# EAGLE board ORing_block (EAGLE 8.1.0)
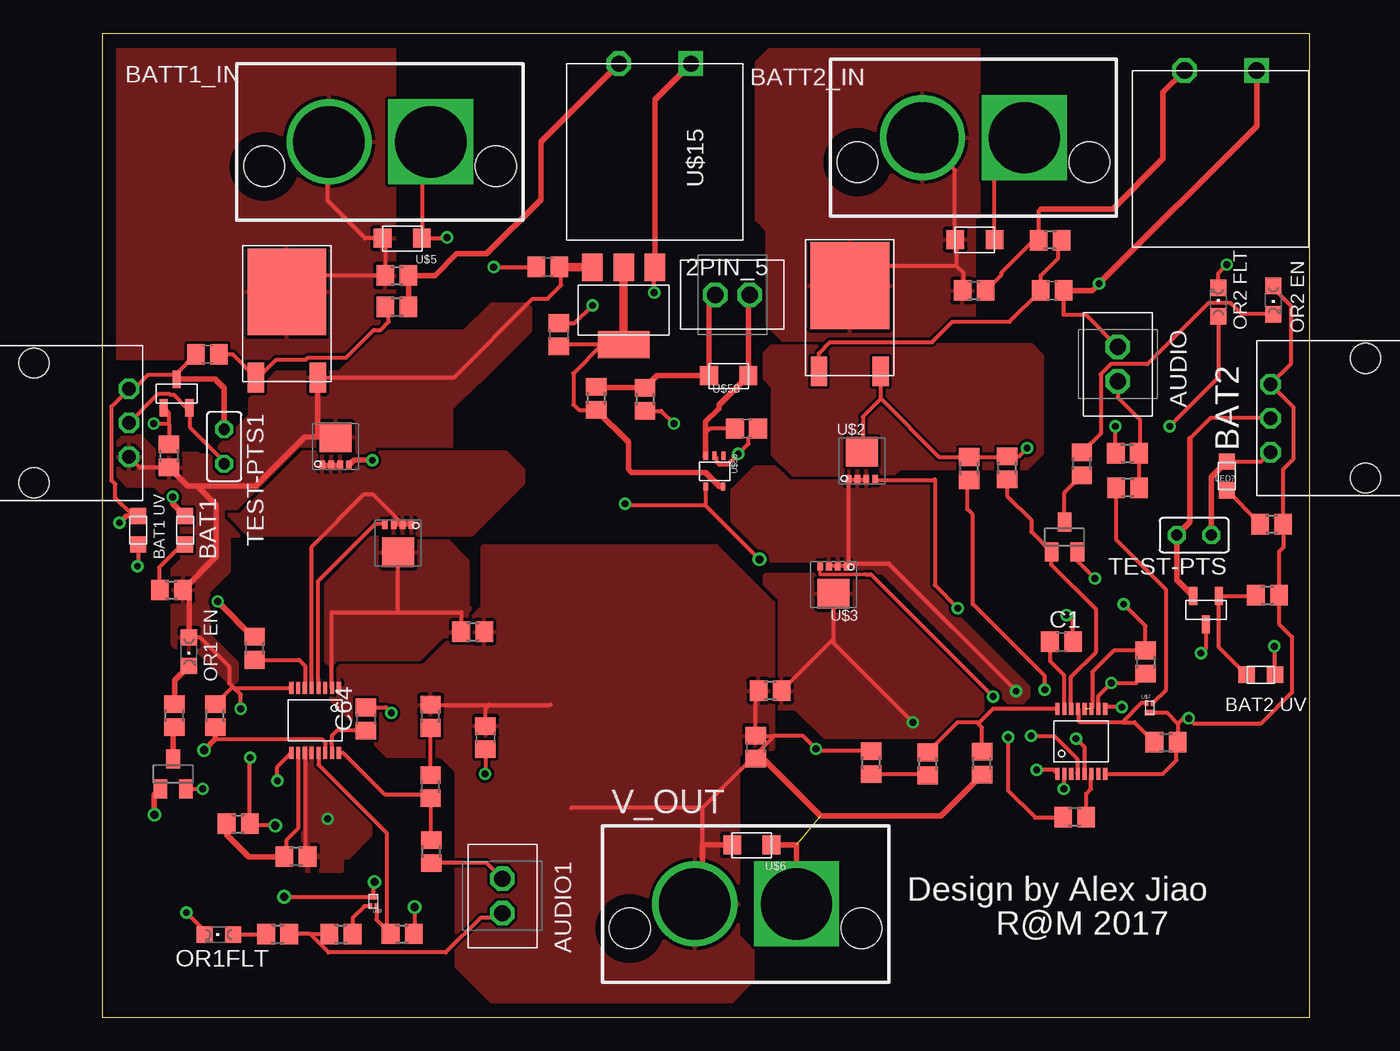
[diagram p0: board, top side]
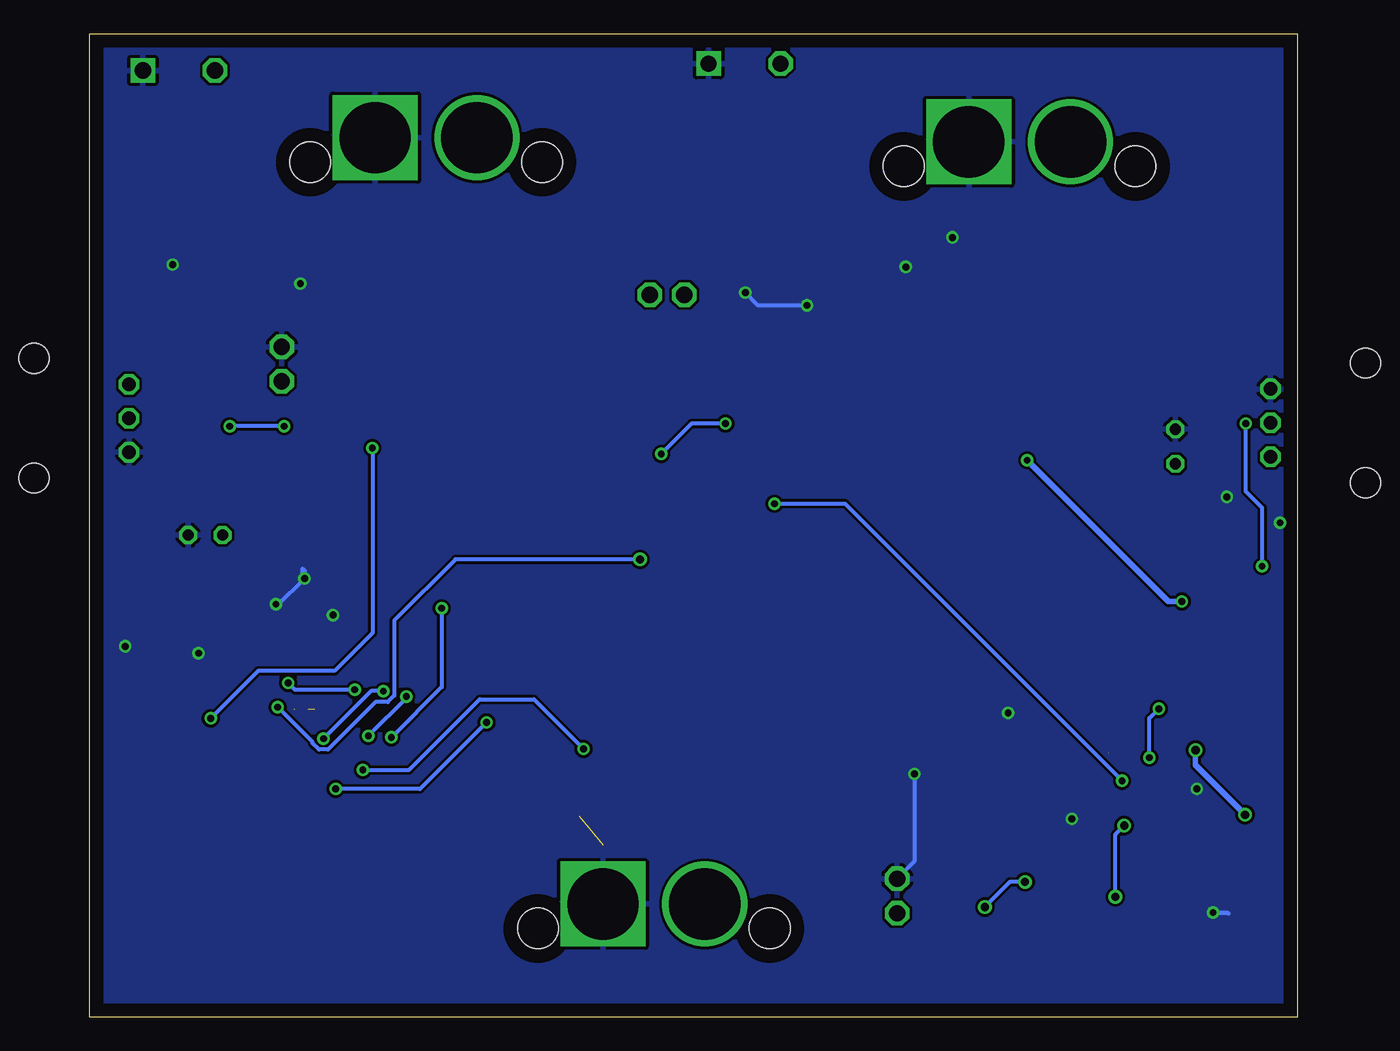
[diagram p1: board, bottom side, seen from below]

Size 88.9 x 72.39 mm. Coordinates in mm from the lower left corner, seen from the top.
Outline: 0,0 88.9,0 88.9,72.39 0,72.39 0,0
Copper layers (1*16): Top 0.035mm / dielectric 1.5mm / Bottom 0.035mm
Design rules "default": minimum track width 10mil, minimum drill 24mil, track to track 8mil, track to pad 8mil, pad to pad 8mil, via to via 8mil, smd to smd 8mil, copper to edge 40mil, drill to drill 8mil, minimum pad ring 10mil, minimum via ring 8mil, stop-mask expansion 4mil, vias tented up to drill 0mil, thermal gap 10mil

## Footprints (pad centres in the part's own frame; a part is rotated, then mirrored left to right if it is on the bottom)
KK254_VERT_2PIN = drill 1.2 octagon: P$1 1.27,0; P$2 -1.27,0
SUPERSABRE_2CIRCUIT = drill 5.25: P$1 -3.747,0 | drill 5.25 square: P$2 3.747,0 | hole 2.997: -8.534,-1.803; 8.534,-1.803
C0805 = smd 1.3 x 1.5: 1 -0.85,0; 2 0.85,0
CHIPLED_0805 = smd 1.2 x 1.2: A 0,-1.05; C 0,1.05
0805 = smd 1.2 x 1.2: P$1 -1.05,0; P$2 1.05,0
PTV09A-4 = drill 1 octagon: P$1 -2.5,0; P$2 0,0; P$3 2.5,0 | hole 2.2: -4.4,7; 4.4,7
R0805 = smd 1.3 x 1.5: 1 -0.85,0; 2 0.85,0
V526-0 = drill 0.813 octagon: 1 -1.27,0; 2 1.27,0
MSOP16 = smd 0.305 x 0.889: DGATE -0.25,-2.39; ENOUT -0.75,2.39; FB -1.75,2.39; FLT -0.25,2.39; GND 0.25,2.39; HGATE 0.75,-2.39; NC -0.75,-2.39; NC1 1.25,-2.39; OUT -1.75,-2.39; OV 0.75,2.39; SENSE -1.25,-2.39; SHDN 1.75,2.39; SOURCE 0.25,-2.39; TMR -1.25,2.39; UV 1.25,2.39; VCC 1.75,-2.39
POWER33 = smd 2.37 x 2.15: DRAIN 0,0.675 | smd 0.42 x 0.7: GATE 0.975,-1.4; SOURCE1 -0.975,-1.4; SOURCE2 -0.325,-1.4; SOURCE3 0.325,-1.4
DO-219AB = smd 1.3 x 1.4: P$1 -1.45,0; P$2 1.45,0
AP02002 = smd 0.4 x 0.25: P$1 -0.35,0.225; P$2 -0.35,-0.225 | smd 0.4 x 0.7: P$3 0.35,0
SOT23 = smd 1 x 1.4: 1 -0.95,-1.1; 2 0.95,-1.1; 3 0,1.1
SOT-23-3 = smd 1.3 x 0.6: P$1 -1.05,0.95; P$2 -1.05,-0.95; P$3 1.05,0
TO252-3 = smd 1.2 x 2.2: 1 -2.28,-6.3; 3 2.28,-6.3 | smd 5.8 x 6.4: TAB 0,0
GPTS203211B = drill 1.2 square: P$1 0,-2.65 | drill 1.2 octagon: P$2 0,2.65
TSSOP5 = smd 0.3 x 0.6: P$1 -0.65,-1.125; P$2 0,-1.125; P$3 0.65,-1.125; P$4 0.65,1.125; P$5 -0.62,1.125
SOT-223 = smd 1.5 x 2: P$1 -2.3,-3.15; P$2 0,-3.15; P$3 2.3,-3.15 | smd 3.8 x 2: P$4 0,2.54

## Placement (x,y rotation side)
2PIN_5  [KK254_VERT_2PIN]  46.4,53.18 180 top
AUDIO  [KK254_VERT_2PIN]  74.78,48.08 270 top
AUDIO1  [KK254_VERT_2PIN]  29.47,8.91 270 top
BATT1_IN  2_SUPERSABRE  [SUPERSABRE_2CIRCUIT]  20.45,64.45 0 top
BATT2_IN  2_SUPERSABRE  [SUPERSABRE_2CIRCUIT]  64.15,64.75 0 top
C1  [C0805]  70.63,27.63 0 top
C2  22u  [C0805]  48.12,19.87 270 top
C3  2.2u  [C0805]  7.75,48.8 180 top
C20  2.2u  [C0805]  69.95,53.5 0 top
C60  1u  [C0805]  47.44,43.33 180 top
C61  10u  [C0805]  32.82,55.23 180 top
C62  10u  [C0805]  33.63,50.25 90 top
C64  [C0805]  19.42,21.95 90 top
C65  22u  [C0805]  28.22,20.58 270 top
JP6  2_SUPERSABRE  [SUPERSABRE_2CIRCUIT]  47.38,8.33 0 top
LED1  Red  [CHIPLED_0805]  82.18,52.65 0 top
LED2  Red  [CHIPLED_0805]  8.6,6.08 90 top
LED3  [CHIPLED_0805]  6.4,26.9 180 top
LED4  [CHIPLED_0805]  86.23,52.8 180 top
LED5  Blue  [0805]  85.3,25.2 0 top
LED6  Blue  [0805]  2.65,35.84 90 top
LED7  Green  [0805]  82.8,39.85 90 top
LED8  Green  [0805]  6.1,35.85 90 top
POT  10k  [PTV09A-4]  86.02,44.1 270 top
POT1  10k  [PTV09A-4]  1.98,43.75 90 top
R2  20.8k  [R0805]  76.82,26.14 270 top
R4  51k  [R0805]  60.77,18.64 270 top
R5  5m  [R0805]  49.18,24.03 180 top
R6  10\  [R0805]  71.6,14.73 180 top
R7  200k  [R0805]  63.83,40.39 90 top
R8  8.2k  [R0805]  56.63,18.74 90 top
R9  5.1k  [R0805]  64.78,18.69 90 top
R10  510  [R0805]  39.97,45.49 270 top
R11  6.8k  [R0805]  36.37,45.56 270 top
R12  20k+  [R0805]  78.32,20.23 0 top
R13  430  [R0805]  75.48,41.52 0 top
R14  330  [R0805]  75.5,38.98 180 top
R15  20k+  [R0805]  22.09,6.13 0 top
R16  430  [R0805]  12.92,6.12 0 top
R17  330  [R0805]  17.59,6.12 0 top
R18  1.2k  [R0805]  5.33,22.19 90 top
R19  20k+  [R0805]  8.33,22.19 90 top
R21  12k  [R0805]  14.28,11.82 180 top
R23  51k  [R0805]  24.18,16.96 90 top
R24  5.1k  [R0805]  24.23,12.19 90 top
R25  5m  [R0805]  27.28,28.37 0 top
R26  10\  [R0805]  11.23,27.15 90 top
R27  200k  [R0805]  10.02,14.23 0 top
R28  8.2k  [R0805]  24.18,22.14 90 top
R29  1.2k  [R0805]  72.13,40.74 90 top
R30  20k+  [R0805]  66.63,40.44 90 top
R31  330  [R0805]  4.92,41.33 270 top
R32  330  [R0805]  85.79,31.07 0 top
R33  1.5k  [R0805]  86.1,36.3 0 top
R34  1.5k  [R0805]  5.1,31.45 0 top
R35  43k  [R0805]  69.8,57.2 180 top
R36  4.3k  [R0805]  64.2,53.5 0 top
R37  43k  [R0805]  21.7,52.3 0 top
R38  4.3k  [R0805]  21.7,54.6 0 top
TEST-PTS  0  [V526-0]  80.4,35.48 180 top
TEST-PTS1  0  [V526-0]  8.98,42.01 270 top
U$1  LTC4364MSOP  [MSOP16]  72.09,20.3 0 top
U$2  [POWER33]  55.94,40.95 0 top
U$3  [POWER33]  53.84,31.85 180 top
U$5  VTVS  [DO-219AB]  22.1,57.35 180 top
U$6  VTVS  [DO-219AB]  47.83,12.68 180 top
U$7  DMP32D5SFB  [AP02002]  77.13,22.77 270 top
U$8  DMP32D5SFB  [AP02002]  19.97,8.52 90 top
U$9  BSS138CT-NDSOT23  [SOT23]  5.23,17.9 0 top
U$10  BSS138CT-NDSOT23  [SOT23]  70.85,35.35 0 top
U$11  TL431DBZ  [SOT-23-3]  81.27,29.96 270 top
U$12  TL431DBZ  [SOT-23-3]  5.48,45.91 90 top
U$13  VTVS  [DO-219AB]  64.25,57.25 180 top
U$14  IPD50P04P4-13  [TO252-3]  13.6,53.4 0 top
U$15  GPTS203212B  [GPTS203211B]  40.7,70.2 90 top
U$19  IPD50P04P4-13  [TO252-3]  55.05,53.85 0 top
U$20  GPTS203212B  [GPTS203211B]  82.35,69.7 90 top
U$27  LTC4364MSOP  [MSOP16]  15.68,21.85 180 top
U$28  [POWER33]  17.19,42.02 0 top
U$32  [POWER33]  21.8,34.9 180 top
U$56  74LVC1G14  [TSSOP5]  45.09,40.2 180 top
U$57  NCP1117  [SOT-223]  38.4,52.05 180 top
U$58  VTVS  [DO-219AB]  46.13,47.23 180 top

## Library data of the parts
2PIN_5 AUDIO AUDIO1 BATT1_IN BATT2_IN JP6 = molex
C1-C3 C20 C60-C62 C64 C65 POT POT1 R2 R4-R19 R21 R23-R38 TEST-PTS TEST-PTS1 = resistor
LED1-LED8 = led
U$1 U$27 = linear
U$2 U$3 U$28 U$32 = fairchild
U$5 U$6 U$13 U$58 = diode
U$7-U$10 = transistor-fet
U$11 U$12 = texas
U$14 U$19 = transistor-power
U$15 U$20 = switches
U$56 = NXP
U$57 = ONSemi

## Nets
GND: AUDIO1.P$2 AUDIO.P$2 BATT1_IN.P$2 BATT2_IN.P$2 C1.2 C2.2 C3.2 C20.2 C61.2 C62.2 C64.2 C65.2 JP6.P$2 LED1.C LED2.C LED5.P$2 LED6.P$2 LED7.P$2 LED8.P$2 POT1.P$3 POT.P$3 R2.1 R9.1 R21.1 R24.1 TEST-PTS1.1 TEST-PTS.1 U$1.GND U$1.OV U$5.P$1 U$6.P$1 U$9.2 U$10.2 U$11.P$3 U$12.P$3 U$13.P$1 U$15.P$1 U$20.P$1 U$27.GND U$27.OV U$57.P$1
N$1: R2.2 R7.1 U$1.UV
N$3: R4.1 R9.2 U$1.FB
N$4: R6.1 U$1.HGATE
N$6: C1.1 U$1.TMR
N$7: R4.2 R8.1
N$8: R6.2 U$2.GATE
N$9: U$1.SOURCE U$2.SOURCE1 U$2.SOURCE2 U$2.SOURCE3 U$3.SOURCE1 U$3.SOURCE2 U$3.SOURCE3
N$10: R5.1 U$1.SENSE U$3.DRAIN
N$11: U$1.DGATE U$3.GATE
N$12: 2PIN_5.P$1 R10.1 R11.1 U$58.P$2
N$13: C62.1 R11.2 U$56.P$5 U$57.P$2 U$57.P$4
N$14: U$1.SHDN U$27.SHDN U$56.P$4
N$15: R14.2 U$7.P$1
N$16: LED1.A R13.1
N$17: R12.1 U$1.FLT U$7.P$2
N$18: AUDIO.P$1 R13.2 R14.1
N$19: LED2.A R16.1
N$20: R15.1 U$8.P$2 U$27.FLT
N$21: R17.2 U$8.P$1
N$22: AUDIO1.P$1 R16.2 R17.1
N$23: POT.P$2 TEST-PTS.2 U$11.P$2
N$24: R18.1 U$9.3
N$25: LED3.C R18.2
N$26: R29.1 U$10.3
N$27: LED4.C R29.2
N$28: R30.1 U$1.ENOUT U$10.1
N$29: R19.1 U$9.1 U$27.ENOUT
N$30: LED5.P$1 R32.1 U$11.P$1
N$31: POT1.P$2 TEST-PTS1.2 U$12.P$2
N$32: LED6.P$1 R31.1 U$12.P$1
N$33: LED7.P$1 R33.1
N$34: LED8.P$1 R34.1
N$35: C20.1 R35.1 U$19.1
N$36: R35.2 R36.2 U$20.P$2
N$37: R26.1 U$27.HGATE
N$38: BATT1_IN.P$1 R38.1 U$5.P$2 U$14.TAB
N$39: R21.2 R27.1 U$27.UV
N$40: C3.1 R37.1 U$14.1
N$41: R37.2 R38.2 U$15.P$2
N$45: BATT2_IN.P$1 R36.1 U$13.P$2 U$19.TAB
N$48: 2PIN_5.P$2 C60.2 U$56.P$3 U$58.P$1
N$49: C60.1 R10.2 U$56.P$2
N$50: R23.1 R24.2 U$27.FB
N$53: C64.1 U$27.TMR
N$54: U$27.SOURCE U$28.SOURCE1 U$28.SOURCE2 U$28.SOURCE3 U$32.SOURCE1 U$32.SOURCE2 U$32.SOURCE3
N$57: R23.2 R28.1
N$59: R26.2 U$28.GATE
N$60: R25.1 U$27.SENSE U$32.DRAIN
N$61: U$27.DGATE U$32.GATE
V_BATT: C2.1 C65.1 JP6.P$1 R5.2 R8.2 R25.2 R28.2 U$1.OUT U$6.P$2 U$27.OUT
V_BATT1: C61.1 LED3.A POT1.P$1 R15.2 R19.2 R27.2 R31.2 R34.2 U$8.P$3 U$14.3 U$27.VCC U$28.DRAIN U$57.P$3
V_BATT2: LED4.A POT.P$1 R7.2 R12.2 R30.2 R32.2 R33.2 U$1.VCC U$2.DRAIN U$7.P$3 U$19.3

## Tracks (layer width: path | path; a pad name or v marks a point on that pad's centre or on a via)
GND  (via drill 0.5)  (2 unrouted)
  Top 0.305: R24.1 28.31,11.34 AUDIO1.P$2 | BATT1_IN.P$2 23.55,63.8 U$5.P$1 25.35,57.35 v25.4,57.4 | U$13.P$1 65.7,62.55 BATT2_IN.P$2 | C20.2 70.8,51.72 72.41,51.72 AUDIO.P$2 | U$10.2 71.78,34.23 71.78,33.62 v73.1,32.3 | 76.64,27.17 R2.1 | R2.1 74.49,26.99 72.9,25.4 72.9,22.75 U$1.OV | U$27.OV 14.93,12.02 R21.1 | LED6.P$2 2.31,36.89 0.97,38.23 0.97,39.23 0.7,39.5 0.7,44.97 POT1.P$3 2.35,46.25 3.4,47.3 5.14,47.3 U$12.P$3 5.48,47.38 C3.2 | C62.2 34.8,51.1 v36.1,52.4 | v40.64,53.34 40.64,55.14 U$57.P$1 | v28.83,55.23 C61.2 | C1.2 71.48,29.12 v71,29.6 | C65.2 28.22,17.92 v28.2,17.9 | C64.2 20.9,22.8 v21.3,22.4 | U$9.2 v7.4,16.8 | LED2.C 7.55,6.35 v6.2,7.7 | U$11.P$3 81.27,27.17 v80.9,26.8 | R2.1 76.82,28.78 v75.2,30.4 | LED1.C 82.18,54.78 v82.8,55.4 | LED7.P$2 85.32,40.9 POT.P$3 | LED5.P$2 86.35,27.25 v86.3,27.3
  Top 0.406: TEST-PTS.1 81.67,39.77 LED7.P$2 | LED6.P$2 1.76,36.89 v1.27,36.4 | v5.2,38.3 5.2,37.8 LED8.P$2 | C2.2 48.68,19.02 52.9,14.8 61.74,14.8 R9.1 | C20.2 72.9,53.5 v73.4,54 85,65.6 U$20.P$1 | U$12.P$3 8.34,46.96 9,46.3 9,43.3 TEST-PTS1.1 | U$57.P$1 40.7,67.55 U$15.P$1 | U$6.P$1 51.13,12.68 JP6.P$2
  Bottom 0.305: v36.1,52.4 39.7,52.4 v40.64,53.34 | 73.1,32.4 v73.1,32.3 75.1,30.3 75.2,30.3 | 73.1,32.4 73.1,32.88 73.24,33.02 73.24,32.54 73.1,32.4 | 71,29.7 v71,29.6 | v71,29.6 71,29.5 71.1,29.4 71,29.4 70.9,29.5 v71,29.6 | v28.2,17.9 28.06,17.9 27.94,17.78 28.08,17.78 v28.2,17.9 | v28.2,17.9 28.2,11.45 AUDIO1.P$2 | v6.2,7.7 6.2,7.8 6.3,7.7 | v6.2,7.7 6.3,7.7 | 6.3,7.7 6.3,7.5 | v6.2,7.7 5.16,7.7 5.08,7.62 6.12,7.62 v6.2,7.7 | v75.2,30.4 75.1,30.4 | 75.1,30.5 75.1,30.4 | 75.1,30.4 75.2,30.3 | 75.2,30.3 75.3,30.3
  Bottom 0.406: v73.4,54 73.5,54
  other vias: 16.6,14.6
  pour Top: 14.9,19.8 14.8,10.8 17.6,10.8 17.6,11.8 18.1,11.8 19.7,13.4 19.7,14.1 15.6,18.2 15.6,19.8
  pour Bottom: 0.2,72.3 0,0.16 88.9,0 88.9,72.39
N$1  (via drill 0.5)
  Top 0.305: R2.2 76.13,24.6 v74.3,24.6 73.34,23.64 U$1.UV | v69.4,24.1 69.4,25.1 64.1,30.4 64.1,37 63.7,37.4 63.7,39.41 R7.1
  Bottom 0.305: v69.4,24.1 73.8,24.1 v74.3,24.6
N$2
  pour Top: 56.7,49.5 68.4,49.5 69.2,48.7 69.2,41.5 68.1,40.4 58.7,40.4 58.2,39.9 50.9,39.9 49.4,41.4 49.4,46.4 48.8,47 48.8,48.9 49.3,49.4 56.6,49.4
N$3
  Top 0.305: U$1.FB 65.59,22.69 64.6,21.7 64.4,21.7 | 64.4,21.7 62.98,21.7 R4.1 | R9.2 64.78,21.32 64.4,21.7
N$4
  Top 0.305: R6.1 72.45,16.45 72.8,16.8 72.8,17.87 U$1.HGATE
N$6
  Top 0.305: U$1.TMR 70.84,25.16 69.8,26.2 69.8,27.61 C1.1
N$7
  Top 0.305: R8.1 60.67,17.89 R4.2
N$8  (via drill 0.5)
  Top 0.305: U$2.GATE 61.25,39.55 61.3,39.6 61.3,31.8 v63,30.1 | v66.7,20.6 66.7,16.7 68.7,14.7 70.72,14.7 R6.2
  Bottom 0.305: v63,30.1 63,24.3 v66.7,20.6
N$9  (via drill 0.5)
  Top 0.305: U$2.SOURCE3 U$2.SOURCE2 U$2.SOURCE1 54.97,33.4 | 54.97,33.4 U$3.SOURCE1 U$3.SOURCE2 U$3.SOURCE3 | 54.97,33.4 57.9,33.4 v67.3,24 | v71.7,20.5 72.3,19.9 72.3,17.95 U$1.SOURCE
  Bottom 0.305: v67.3,24 68.2,24 v71.7,20.5
  pour Top (rank 2): 48.1,40.5 61.1,40.5 62.1,39.5 62.1,33.9 61.5,33.3 61.5,31 68.2,24.3 68.2,23.6 67.7,23.1 66.8,23.1 66,23.9 66,24.2 57.5,32.7 53.2,32.7 52.3,33.6 49.3,33.6 46.4,36.5 46.4,38.8
N$10  (via drill 0.5)
  Top 0.305: U$3.DRAIN 53.84,27.84 | 53.84,27.84 R5.1 | 53.84,27.84 53.84,27.56 v59.7,21.7 | v70.8,16.8 70.84,16.84 U$1.SENSE
  Bottom 0.305: v59.7,21.7 64.6,16.8 v70.8,16.8
  pour Top (rank 3): 48.9,32.6 56.2,32.6 64.8,24 64.8,22 63.4,20.6 53.2,20.6 51.1,22.7 49.4,22.7 49.2,22.9 49.2,30.8 48.8,31.2 48.8,32.5
N$11  (via drill 0.5)
  Top 0.254: U$3.GATE 52.87,32.6 56.2,32.6
  Top 0.305: 56.2,32.6 56.6,32.6 v65.6,23.6 | v68.4,20.7 70.1,20.7 71.8,19 71.8,17.95 U$1.DGATE
  Bottom 0.305: v65.6,23.6 65.6,23.5 v68.4,20.7
N$12
  Top 0.406: R11.1 36.44,46.34 R10.1 40.86,47.23 U$58.P$2 44.68,52.73 2PIN_5.P$1
N$13
  Top 0.305: C62.1 33.74,49.51 U$57.P$4 36.81,49.51 34.7,47.4 34.7,45.1 35.1,44.7 R11.2
  Top 0.406: R11.2 38.75,42.33 38.75,40.35 38.99,40.11 44.43,40.11 45.47,39.08 U$56.P$5
  Top 0.61: U$57.P$2 U$57.P$4
N$14  (via drill 0.5, 0.6)  (2 unrouted)
  Top 0.305: U$56.P$4 44.44,37.66 | 44.44,37.66 v48.4,33.7 | v75.08,22.82 73.97,22.82 U$1.SHDN | 44.44,37.66 38.64,37.66 v38.5,37.8 | v12.9,17.4 12.9,18.43 U$27.SHDN
  Bottom 0.305: v75.08,22.82 72.51,20.25 72.51,20.16 72.03,19.69 71.36,19.69 67.86,23.19 66.97,23.19 66.49,23.66 66.49,29.19 61.98,33.7 v48.4,33.7 | v38.5,37.8 33.3,37.8 v12.9,17.4
N$15
  Top 0.305: R14.2 74.65,35.15 78.3,31.5 78.3,24.07 U$7.P$1
N$16  (via drill 0.5)
  Top 0.305: R13.1 74.6,41.55 v74.6,43.5 | LED1.A 82.18,47.08 v78.6,43.5
  Bottom 0.305: v74.6,43.5 v78.6,43.5
N$17
  Top 0.305: U$7.P$2 76.52,23.12 75.1,21.7 | 75.1,21.7 72,21.7 71.9,21.8 71.9,22.63 U$1.FLT | 75.1,21.7 76,21.7 R12.1
N$18
  Top 0.305: AUDIO.P$1 74.78,45.62 76.4,44 76.4,41.59 R13.2 76.35,41.5 R14.1
N$19
  Top 0.305: LED2.A 12.03,6.08 R16.1
N$20
  Top 0.305: U$8.P$2 20.2,7.17 R15.1 20.95,6.42 20.95,13.55 15.93,18.57 U$27.FLT
N$21
  Top 0.305: U$8.P$1 19.32,8.17 18.45,7.3 R17.2
N$22
  Top 0.305: R17.1 15.3,6.12 | 15.3,6.12 R16.2 | AUDIO1.P$1 29.47,7.32 27.87,7.32 25.3,4.75 16.67,4.75 15.3,6.12
N$23
  Top 0.305: POT.P$2 81.6,44.1 80.1,42.6
  Top 0.406: 80.1,42.6 80.1,36.45 TEST-PTS.2 79.13,32.2 U$11.P$2
N$24
  Top 0.406: U$9.3 5.23,21.24 R18.1
N$25
  Top 0.406: R18.2 5.33,24.78 LED3.C
N$26
  Top 0.305: U$10.3 70.85,38.61 R29.1
N$27
  Top 0.305: 71.94,41.4 R29.2 73.52,42.98 73.52,47.33 74.26,48.07 76.94,48.07 81.43,52.56 83.1,52.56 83.9,51.75 LED4.C
N$28
  Top 0.305: R30.1 66.63,38.37 68.4,36.6 68.4,35.75 U$10.1 69.9,33.3 73.2,30 73.2,26.9 71.34,25.04 U$1.ENOUT
N$29  (via drill 0.6)
  Top 0.305: 8.33,20.48 16.17,20.48 16.4,20.25 16.4,19.49 U$27.ENOUT
  Top 0.406: R19.1 8.33,20.48 v7.5,19.65 | v3.85,14.9 3.85,16.37 U$9.1
  Bottom 0.406: v7.5,19.65 7.5,18.55 v3.85,14.9
N$30
  Top 0.305: LED5.P$1 82.22,27.23 U$11.P$1 84.88,31.01 R32.1
N$31
  Top 0.305: POT1.P$2 3.87,45.64 3.87,45.66 4.08,45.87 4.98,45.87 5.04,45.8 5.3,45.8 6.24,44.86 U$12.P$2 6.5,44.79 6.5,43.4 8.98,40.92 TEST-PTS1.2
N$32  (via drill 0.5)
  Top 0.305: 4.92,43.7 R31.1 | 4.92,43.7 4.92,44.47 U$12.P$1 | LED6.P$1 2.65,33.25 v2.6,33.2 | v3.8,43.7 4.92,43.7
  Bottom 0.305: v2.6,33.2 2.6,37.5 3.8,38.7 v3.8,43.7
N$33
  Top 0.305: R33.1 85.25,36.35 LED7.P$1
  Top 0.406: LED7.P$1 82.8,38.75
N$34
  Top 0.305: LED8.P$1 5.9,34.8 4.2,33.1 4.2,31.5 R34.1
N$35
  Top 0.305: R35.1 70.4,56.95 70.4,55.9 69.1,54.6 C20.1 66.8,51.2 62.6,51.2 61.1,49.7 53.6,49.7 52.77,48.87 U$19.1
N$36
  Top 0.305: 69.1,59.5 68.95,59.35 R35.2 68.6,57.2 66.2,54.8 66.2,54.65 R36.2
  Top 0.406: 69.1,59.5 74.4,59.5 78.1,63.2 78.1,68.1 U$20.P$2
N$37
  Top 0.305: R26.1 14.5,26.3 14.95,25.85 14.95,24.26 U$27.HGATE
N$38
  Top 0.305: U$14.TAB 14.8,54.6 R38.1 20.85,57.15 U$5.P$2 19.35,57.35 16.6,60.1 16.6,64.35 BATT1_IN.P$1
  pour Top (rank 2): 0,71.4 21.5,71.4 21.5,48.5 0,48.5
N$39
  Top 0.305: U$27.UV 14.43,13.88 13.55,13 13.55,11.94 R21.2 13.41,11.84
  Top 0.406: R27.1 9.17,13.43 10.8,11.8 13.41,11.8 R21.2
N$40
  Top 0.305: C3.1 9.62,48.8 U$14.1 11.5,47.1 12.8,48.4 14.98,48.4 15.13,48.56 17.96,48.56 20,50.6 20.5,50.6 21.1,51.2 21,52.15 R37.1
N$41
  Top 0.406: R37.2 R38.2 24.5,54.6 26.1,56.2 28.3,56.2 32.3,60.2 32.3,64.45 U$15.P$2
N$45
  Top 0.305: BATT2_IN.P$1 62.8,62.35 U$13.P$2 63.35,56.7 62.9,56.7 62.9,55.3 | 55.5,54.3 U$19.TAB 56.5,55.3 62.9,55.3 | 62.9,55.3 63.4,54.8 63.4,53.55 R36.1
  pour Top (rank 2): 64.5,71.5 64.5,58.9 64.2,58.9 64.2,50.5 61.2,50.5 60.3,49.6 50.4,49.6 49,51 49,57.9 48.2,58.7 48.2,70.3 49.2,71.3 49.4,71.5
N$48
  Top 0.305: C60.2 44.77,43.33 44.44,43
  Top 0.406: 44.38,41.27 U$56.P$3 44.44,43 44.44,43.84 45.4,44.8 45.4,45.05 U$58.P$1 47.58,53.09 2PIN_5.P$2
N$49  (via drill 0.5)
  Top 0.305: C60.1 47.6,42.64 47.6,42.23 v46.83,41.47 46.04,40.67 45.44,40.67 45.23,40.88 45.23,41.18 U$56.P$2 | R10.2 41.16,44.64 v42.1,43.7
  Bottom 0.305: v42.1,43.7 44.6,43.7 v46.83,41.47
N$50
  Top 0.305: U$27.FB 17.74,19.46 20.8,16.4 23.89,16.4 R23.1 24.18,13.09 R24.2
N$53
  Top 0.305: C64.1 17.3,21.1 16.9,20.7 16.9,20.47 16.91,20.46 16.91,20.08 | 16.91,20.08 16.93,20.06 | U$27.TMR 16.93,20.06 | 16.93,20.06 16.91,20.08
N$54
  Top 0.305: U$32.SOURCE3 21.7,36.3 | U$27.SOURCE 15.43,34.63 19.3,38.5 19.93,38.5 U$32.SOURCE2
  Top 0.406: U$28.SOURCE1 U$28.SOURCE2 U$28.SOURCE3 | 21.7,36.3 U$32.SOURCE2 U$32.SOURCE1
  pour Top: 14.8,41.6 29.7,41.6 31,40.3 31,39.3 27.2,35.5 10.8,35.5 9.3,37 10.2,37
N$57
  Top 0.305: R23.2 R28.1
N$59  (via drill 0.5)
  Top 0.406: R26.2 11.1,28 v8.5,30.6 | v19.9,41 18.55,41 U$28.GATE
  Bottom 0.406: v8.5,30.6 9.5,30.6 v19.9,41
N$60
  Top 0.305: U$27.SENSE 16.9,24.24 16.9,29.8 21.8,29.8 | 21.8,29.8 U$32.DRAIN | 21.8,29.8 26.43,29.8 R25.1
  pour Top (rank 2): 18.9,35.3 25.2,35.3 26.9,33.6 26.9,30.3 27.3,29.9 27.3,26.2 26.9,25.8 16.9,25.8 16.5,26.2 16.5,31.9 18.9,34.3
N$61
  Top 0.254: 15.93,24.84 15.9,24.84
  Top 0.305: U$32.GATE 20.1,36.3 15.9,32.1 15.9,24.84 | U$27.DGATE 15.93,24.84
V_BATT  (via drill 0.5)
  Top 0.305: 28.5,22.99 33.03,22.99 | R28.2 28.5,22.99 | C65.1 28.22,22.71 28.5,22.99 | R8.2 52.71,19.59 v52.55,19.75 51.6,20.7 49.5,20.7 | R5.2 48.12,23.82 C2.1 48.14,20.7 49.5,20.7 | U$1.OUT 70.05,18.2 v68.8,18.2 | 49.5,20.7 44.2,15.4 | 44.2,15.4 44.2,11.34 44.2,8.9 JP6.P$1 | 44.2,15.4 34.53,15.4
  Top 0.406: U$6.P$2 44.2,12.68 44.2,11.34
  Bottom 0.305: v68.8,18.2 65.4,18.2 60.2,23.4 56.2,23.4 v52.55,19.75
  pour Top: 28.1,34.7 45.2,34.7 49.4,30.5 49.4,19.8 49.3,19.7 47.3,19.7 46.8,19.2 46.8,6 47.9,4.9 47.9,2.7 46,0.8 29,0.8 26.1,3.7 26.1,18.1 25,19.2 21,19.2 16.9,23.3 16.9,25.2 17.6,25.9 23.7,25.9 28,30.2 28,34.6
V_BATT1  (via drill 0.5, 0.6)
  Top 0.305: 9.7,24.24 U$27.VCC | 9.7,24.24 9.53,24.24 R19.2 | LED3.A 7.2,27.95 9.35,25.8 9.35,24.59 9.7,24.24 | v13.4,8.85 13.42,8.87 U$8.P$3 19.97,9.87 v20.05,9.95 | v12.75,14.1 11,14.1 R27.2 10.87,19.07 v10.9,19.1 | v23,8.1 23,6.19 R15.2 | v10.2,22.7 10.2,23.74 9.7,24.24 | R31.2 2.75,40.48 POT1.P$1 | 36.07,55.23 U$57.P$3 | U$14.3 25.9,47.1 31.7,52.9 32.8,52.9 33.8,53.9 33.8,55.1 C61.1
  Top 0.406: U$57.P$3 35.8,55.5 | U$28.DRAIN 15.88,42.7 | 15.88,42.7 U$14.3 | 15.88,42.7 14.89,42.7 11.3,39.1 7,39.1 | R31.2 6.3,39.1 7,39.1 | 7,39.1 8.4,37.7 8.4,33.9 R34.2 6.4,31 LED3.A
  Top 0.61: C61.1 36.07,55.23
  Bottom 0.305: v13.4,8.85 13.4,13.45 v12.75,14.1 | v20.05,9.95 21.15,9.95 v23,8.1 | v10.9,19.1 10.9,22 v10.2,22.7
  pour Top (rank 2): 31.5,52.2 31.5,50.5 27.8,46.8 27.7,46.8 25.7,44.8 25.7,37.5 23.8,35.6 19.7,35.8 13.84,35.44 9.3,35.4 9.3,32.8 7.8,31.3 7.8,28.2 9.9,26.1 9.9,24.8 9.6,24.5 9.5,24.5 7,27 5.6,27 5.2,27.4 5.2,33 5.9,33.7 5.9,37.1 3.9,39.1 1.9,39.1 1.1,39.9 1.1,42.3 1.6,42.8 2.8,42.8 4.1,41.5 7,41.5 7.1,41.4 8,41.4 10.9,44.3 10.9,45.5 12.9,47.5 17.5,47.5 19.1,49.1 19.2,49.1 20.6,50.5 26.7,50.5 28.7,52.5 31.2,52.5
V_BATT2  (via drill 0.5)
  Top 0.305: 57.33,45.53 U$19.3 | 57.33,45.53 56,44.2 56,41.69 U$2.DRAIN | 57.33,45.53 61.62,41.24 R7.2 66.58,41.24 R30.2 67.49,41.29 v68.1,41.9 | U$7.P$3 78.38,22.42 79.2,21.6 | 79.2,21.6 79.2,20.26 R12.2 79.1,20.16 79.1,18.9 78.11,17.91 U$1.VCC | 79.2,21.6 79.6,22 v80,22 80.4,21.6 85.3,21.6 87.6,23.9 87.6,28 86.64,28.96 R32.2 86.64,34.24 87,34.6 87,36.25 R33.2 86.95,40.35 87.73,41.13 87.73,44.89 POT.P$1 87.5,48.08 87.5,52.4 86.23,53.67 LED4.A
  Bottom 0.305: v68.1,41.9 68.1,28.3 70.9,25.5 76.5,25.5 v80,22

## Text on the board
tPlace: OR2 EN | OR2 FLT | BAT2 | BAT1 UV | BAT1 | OR1 EN | BAT2 UV | V_OUT | Design by Alex Jiao | R@M 2017 | OR1FLT